# Altium PCB PCB3_3D.PcbDoc
Units mil, origin at the board's own origin, x right, y up, seen from the top; angles counter-clockwise.
Board outline 2978 x 3898 mil, 2 copper layers (Top Layer, Bottom Layer); 24 components, 87 nets, 148 pads, 0 vias.
Unrouted connection lines stored in the file: 67.
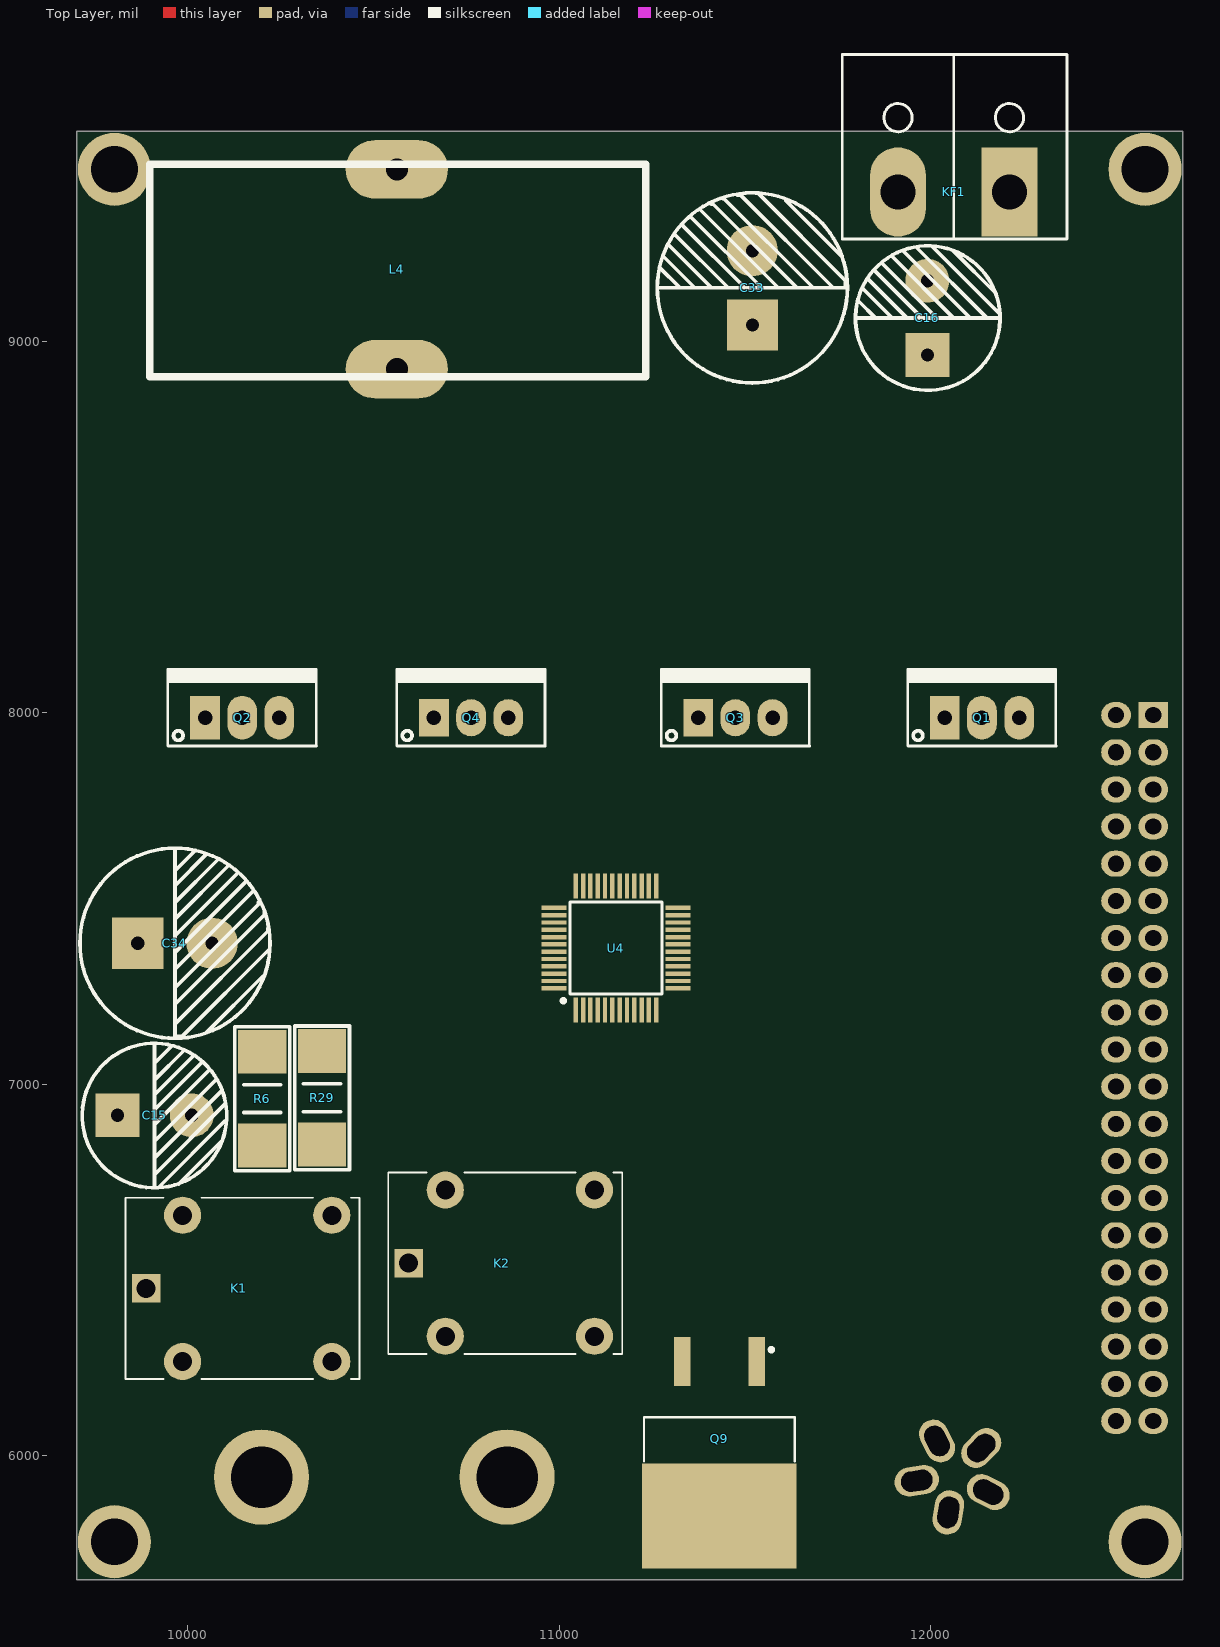
[diagram p0: Top Layer view]
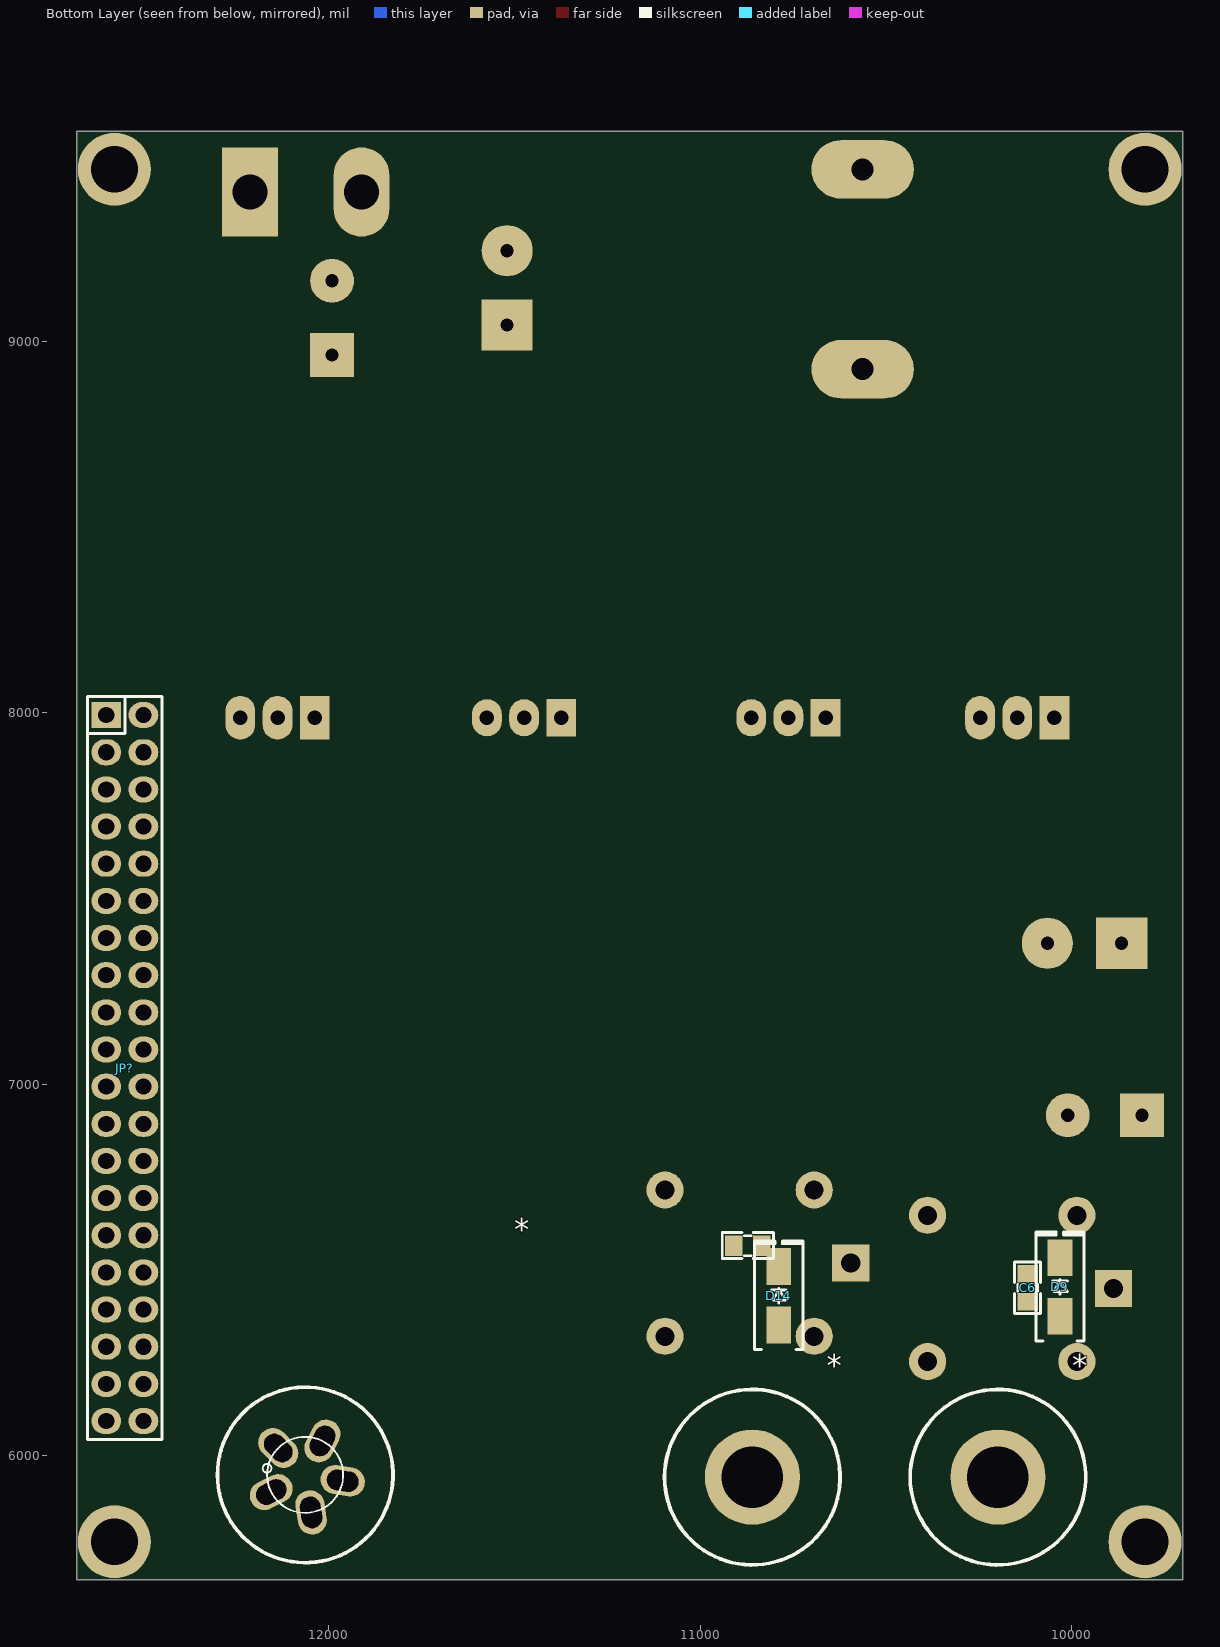
[diagram p1: Bottom Layer view, seen from below]

## Layer stack, top to bottom
Top Solder: solder mask 0.4, Solder Resist, Dk 3.5
Top Layer: signal copper 1.4
Dielectric 1: dielectric 12.6, FR-4, Dk 4.8
Bottom Layer: signal copper 1.4
Bottom Solder: solder mask 0.4, Solder Resist, Dk 3.5

## Board outline
9701,5667 9701,9565 12679,9565 12679,5667

## Design rules (kind name [scope] priority, off if disabled: settings)
Clearance [All] p1: gap=20 ignorepadtopadclearanceinfootprint=FALSE
DiffPairsRouting [All] p1: maxlimit=10 minlimit=8 mostfreqgap=10 toplayer_minwidth=8 toplayer_maxwidth=13 toplayer_prefwidth=10 bottomlayer_minwidth=8 bottomlayer_maxwidth=13 bottomlayer_prefwidth=10 maxuncoupledlength=500
PolygonConnect [All] p1: connectstyle=Direct reliefconductorwidth=10 reliefentries=4 polygonreliefangle="90 Angle" airgapwidth=10
RoutingVias [All] p1: holewidth=11.81 width=23.62 viastyle="Through Hole" minholewidth=11.81 minwidth=23.62 maxholewidth=11.81 maxwidth=23.62
SolderMaskExpansion [All] p1: expansion=4 istentingtop=FALSE
Width [All] p1: maxlimit=80 minlimit=8 preferedwidth=20
29 further rules are at their usual default settings.

## Classes and differential pairs
component class Main: C6 C15 C16 C33 C34 D9 D14 JP? K1 K2 KF1 L4 Q1 Q2 Q3 Q4 Q9 R6 R29 U4
differential pair S: +S_P -S_N
differential pair SO: +SO_P -SO_N

## Components (designator, comment, footprint, x,y, rotation, side; value= is the part's Value field where it differs from the comment)
* "Component_1" GX_12Jack? 12063.48,5949 r45 bottom
* "Jack2" jack_coc_loa 10199.06,5943 r180 bottom
* "Jack1" jack_coc_loa 10860.06,5943 r180 bottom
C6 "10pF" "tu 0805" 10119,6453 r270 bottom
C15 "1000uF" "tu hoa 10mm" 9911,6917 r0 top
C16 "1000uF" "tu hoa 10mm" 11991.27,9063 r90 top
C33 "1000uF" "tu hoa 13mm" 11520,9144 r90 top
C34 "1000uF" "tu hoa 13mm" 9966,7380 r0 top
D9 "SS34" "DIODE SMA" 10032,6455 r90 bottom
D14 "SS34" "DIODE SMA" 10789,6431.26 r90 bottom
JP? "JP 2x20 2.54" "JP 2x20 DT" 12549,7044 r270 bottom
K1 "SRA-05VDC-CL" RELAY_SRA-05VDC-CL 10148,6451 r0 top
K2 "SRA-05VDC-CL" RELAY_SRA-05VDC-CL 10855,6519 r0 top
KF1 "CON 2 KF7.62" "CON 2 KF7.62" 12210,9402 r180 top
L4 "97uH" IND_ATCA-08-750M-V 10563,9250 r270 top
Q1 "IRFZ44" TO220#1 12038,7987 r0 top
Q2 "IRFZ44" TO220#1 10047,7987 r0 top
Q3 "IRFZ44" TO220#2 11374.33,7987 r0 top
Q4 "IRFZ44" TO220#2 10663,7987 r0 top
Q9 "IRF4905S" D2PACK 11410,6013 r270 top
R6 "0.01R" "tro smd 2512" 10201,6962 r270 top
R29 "0.01R" "tro smd 2512" 10362,6964 r270 top
U4 "STM32F103C8T6" LQFP-48_19.6_393_58X11_SMD 11153,7367 r90 top
? "10pF" "tu 0805" 10872,6566 r0 bottom

## Footprints (in the part's own frame and the unit in brackets; to place one, negate y for a bottom-side part, rotate by r counter-clockwise, add the part's x,y. Pads: shape width x height; smd on the part's side, far side on the other; paste and mask are expansions set on the pad)
"CON 2 KF7.62" [mil]
  rect 150x240 hole 95: 1(-2,0)
  oval 150x240 hole 95: 2(298,0)
  silkscreen extent -157,-370 448,126, body extent -152,-370 448,122, height 493
D2PACK [mil]
  rect 132.23x44.65 smd: 1(-241.08,121.35) 3(-241.08,-78.65)
  rect 282.7x416 smd: 2(175.12,21.35)
  silkscreen extent -278,-182 28,224, body extent -282,-171 293,216, height 166
"DIODE SMA" [mm] "SMA"
  rect 2.5x1.7 smd: 1(-2,0) 2(2,0)
  silkscreen extent -3.68,-1.65 3.75,1.65, body extent -2.6,-1.37 2.6,1.37, height 2.4
GX_12Jack? [mm]
  oval 3.048x2 hole 1.4 slot 2.159 at 0 deg: 1(2.606,0)
  oval 3.048x2 hole 1.4 slot 2.159 at 108 deg rot 108: 2(0.809,-2.473)
  oval 3.048x2 hole 1.4 slot 2.159 at 36 deg rot 36: 3(-2.098,-1.528)
  oval 3.048x2 hole 1.4 slot 2.159 at 144 deg rot 144: 4(-2.098,1.528)
  oval 3.048x2 hole 1.4 slot 2.159 at 72 deg rot 72: 5(0.809,2.473)
  silkscreen extent -6,-6 6,6, body extent -10.89,-11.1 10.89,11.1, height 16.11
IND_ATCA-08-750M-V [mm]
  oval 4x7 hole 1.5: 1(-5.4,0) 2(8.255,0)
  silkscreen extent -5.75,-16.89 8.76,17.02
jack_coc_loa [mm]
  round 6.5 hole 4.2: 1(0,0)
  silkscreen extent -6,-6 6,6, body extent -6.45,-6.4 6.35,6.4, height 28.2
"JP 2x20 DT" [mil] "40 pins, dual pin, straight, gold plating"
  rect 70x80 hole 43.31: 1(-950,-50)
  oval 70x80 hole 43.31: 2(-850,-50) 3(-750,-50) 4(-650,-50) 5(-550,-50) 6(-450,-50) 7(-350,-50) 8(-250,-50) 9(-150,-50) 10(-50,-50) 11(50,-50) 12(150,-50) 13(250,-50) 14(350,-50) 15(450,-50) 16(550,-50) 17(650,-50) 18(750,-50) 19(850,-50) 20(950,-50) 21(950,50) 22(850,50) 23(750,50) 24(650,50) 25(550,50) 26(450,50) 27(350,50) 28(250,50) 29(150,50) 30(50,50) 31(-50,50) 32(-150,50) 33(-250,50) 34(-350,50) 35(-450,50) 36(-550,50) 37(-650,50) 38(-750,50) 39(-850,50) 40(-950,50)
  silkscreen extent -1000,-100 1000,100, body extent -1000,-100 1000,100, height 337
LQFP-48_19.6_393_58X11_SMD [mm] "48LQFP"
  rect 1.7x0.3 smd mask+0.076: 1(-4.238,2.75) 2(-4.238,2.25) 3(-4.238,1.75) 4(-4.238,1.25) 5(-4.238,0.75) 6(-4.238,0.25) 7(-4.238,-0.25) 8(-4.238,-0.75) 9(-4.238,-1.25) 10(-4.238,-1.75) 11(-4.238,-2.25) 12(-4.238,-2.75) 25(4.238,-2.75) 26(4.238,-2.25) 27(4.238,-1.75) 28(4.238,-1.25) 29(4.238,-0.75) 30(4.238,-0.25) 31(4.238,0.25) 32(4.238,0.75) 33(4.238,1.25) 34(4.238,1.75) 35(4.238,2.25) 36(4.238,2.75)
  rect 0.3x1.7 smd mask+0.076: 13(-2.75,-4.238) 14(-2.25,-4.238) 15(-1.75,-4.238) 16(-1.25,-4.238) 17(-0.75,-4.238) 18(-0.25,-4.238) 19(0.25,-4.238) 20(0.75,-4.238) 21(1.25,-4.238) 22(1.75,-4.238) 23(2.25,-4.238) 24(2.75,-4.238) 37(2.75,4.238) 38(2.25,4.238) 39(1.75,4.238) 40(1.25,4.238) 41(0.75,4.238) 42(0.25,4.238) 43(-0.25,4.238) 44(-0.75,4.238) 45(-1.25,4.238) 46(-1.75,4.238) 47(-2.25,4.238) 48(-2.75,4.238)
  silkscreen extent -3.72,-3.15 3.15,3.72, body extent -4.5,-4.5 4.5,4.5, height 1.7
RELAY_SRA-05VDC-CL [mm]
  round 2.54 hole 1.3: COIL1(-4.1,5) COIL2(-4.1,-5) NC(6.1,5) NO(6.1,-5)
  rect 1.95x1.95 / inner round 1.95 / far side rect 2.54x2.54 hole 1.3: COM(-6.6,0)
  silkscreen extent -8,-6.2 8,6.2, body extent -8,-6.2 8,6.2, height 17.2
TO220#1 [mil] "TO-220"
  rect 80x118.11 hole 39: 1(0,0)
  oval 80x118.11 hole 39: 2(100,0) 3(200,0)
  silkscreen extent -100,-76 300,130, body extent -95,-80 295,97, height 323
TO220#2 [mil] "TO-220"
  rect 80x100 hole 39: 1(0,0)
  oval 80x100 hole 39: 2(100,0) 3(200,0)
  silkscreen extent -100,-76 300,130, body extent -95,-80 295,97, height 323
"tro smd 2512" [mm]
  rect 3x3.3 smd: 1(-3.2,0) 2(3.2,0)
  silkscreen extent -4.9,-1.88 4.93,1.88, body extent -3.12,-1.57 3.18,1.58, height 0.82
"tu 0805" [mm] "Compoment SMD 80x50mil"
  rect 1.2x1.4 smd: 1(-0.946,-0.003) 2(0.954,-0.003)
  silkscreen extent -1.75,-0.89 1.75,0.89, body extent -1.01,-0.64 1.01,0.63, height 0.61
"tu hoa 10mm" [mm]
  rect 3x3 hole 0.9: 1(-2.54,0)
  round 3 hole 0.9: 2(2.54,0)
  silkscreen extent -4.95,-4.96 4.93,4.92, body extent -5,-5 5.01,5, height 20.01
"tu hoa 13mm" [mm]
  rect 3.5x3.5 hole 0.9: 1(-2.54,0)
  round 3.5 hole 0.9: 2(2.54,0)
  silkscreen extent -6.5,-6.5 6.5,6.5, body extent -6.25,-6.25 6.26,6.25, height 23.02

## Part data
* *: library part Jack?
C6 ?: library part "Tu 0805 101 50V 20%", "Dán", Chung_Loai=Dán, Don_Vi=Con, Ma_Hang=MH002806, So_Chan=2, Ten_Linh_Kien="Tụ 0805 101-0.1nF 50V 20%"
C15 C16: library part "Tu Hoa 1000uF 10V 10x12", "Cắm", Chung_Loai=Cắm, Don_Vi=Con, Ma_Hang=MH006614, So_Chan=2, Ten_Linh_Kien="Tụ Hóa 1000uF 10V 10x12MM"
C33 C34: library part "Tu Hoa 1000uF 50V 13x26", "Cắm", Chung_Loai=Cắm, Don_Vi=Con, Ma_Hang=MH006619, So_Chan=2, Ten_Linh_Kien="Tụ Hóa 1000uF 50V"
D9 D14: library part "Diode SS34 ( 1N5822 )", "Dán", Chung_Loai=Dán, Don_Vi=Con, Ma_Hang=MH002104, Ten_Linh_Kien="Diode SS34 3A 40V SMA ( 1N5822 SS34A)"
JP?: library part "JP 2x20 2.54 Duc Thang", "Cắm", Chung_Loai=Cắm, Don_Vi=Con, Ma_Hang=MH002686, Ten_Linh_Kien="Jump Đôi Đực 2.54MM 2x40P Thẳng 11MM"
K1 K2: Package=Package, Check_prices=https://www.snapeda.com/parts/SRA-05VDC-CL/Songle+Relay/view-part/?ref=eda, MF="Songle Relay", MP=SRA-05VDC-CL, SnapEDA_Link=https://www.snapeda.com/parts/SRA-05VDC-CL/Songle+Relay/view-part/?ref=snap
KF1: "Cắm", Chung_Loai=Cắm, Don_Vi=Con, Ma_Hang=MH002053, Ten_Linh_Kien="CON 2 KF7.62-2P 7.62MM (Đen Thẳng)"
L4: library part ATCA-08-750M-V, Package=None, Availability=Unavailable, MP=ATCA-08-750M-V, Price=None
Q1 Q2 Q3 Q4: library part "FET IRFZ44 DIP", "TO-220"
Q9: "55V 75A"
R6 R29: library part "Tro 2512 1% 0.01R", "Dán", Chung_Loai=Dán, Don_Vi=Con, Ma_Hang=MH004912, So_Chan=2, Ten_Linh_Kien="Trở 2512 1% R010-0.01R 1W"
U4: library part IC_STM32F103C8T6, "ARM® Cortex®-M3 STM32F1 Microcontroller IC 32-Bit 72MHz 64KB (64K x 8) FLASH 48-LQFP (7x7)", Alternate Part Number-1=NA, Case/Package=LQFP48, Manufacturer=STMicroelectronics, Manufacturer Part Number=STM32F103C8T6, Supplier Part Number-1=STM32F103C8T6, Supplier-1=LCSC

## Free pads (board coordinates)
  round 196.85 hole 125.98: 12(9803,5769) 12(9803,9463) 12(12577,5769) 12(12577,9463)

## Nets (pads, with @x,y where several pads share a name; then routed paths per layer and width w, separated by ;. In a path a pad name is that pad's centre, name@x,y a point inside that pad or via, vN(x,y) a via of type N, cw(c..) or ccw(c..) an arc to the next point about the centre after c; other vN are vias at no path point)
3v3: U4.24 U4.36 U4.48
+5: JP?.24 JP?.38
+12: ?.1 C6.1 D9.2 D14.2 JP?.23 JP?.39 K1.COIL1 K2.COIL1
AGND: U4.8
AVCC: U4.9
Blue: *.2 K2.NO
BT1: JP?.28 U4.46
BT2: JP?.13 U4.45
BT3: JP?.29 U4.43
BT4: JP?.12 U4.42
BT5: JP?.30 U4.41
buzzer: JP?.27 U4.3
CLK: U4.37
CS: JP?.34 U4.21
current_sense: U4.12
DC: JP?.8 U4.18
enc_a: JP?.10 U4.38
enc_b: JP?.31 U4.39
enc_c: JP?.11 U4.40
GND: JP?.2 JP?.3 JP?.4 JP?.16 JP?.17 U4.23 U4.35 U4.47
Green: *.3
heater: 
HS1: Q1.1
HS2: Q2.1
IO: U4.34
led: JP?.14 U4.2
LS1: Q3.1
LS2: Q4.1
MISO: JP?.9 U4.16
MOSI: JP?.33 U4.17
Net_2: ?.2 D14.1 K2.COIL2
NetC2_2: 
NetC6_2: C6.2 D9.1 K1.COIL2
NetC22_2: 
NetC43_2: 
NetC65_1: U4.5
NetC66_1: U4.6
NetD2_2: 
NetD3_2: 
NetD5_2: 
NetD6_2: 
NetD10_1: Q9.1
NetD13_2: 
NetIC1_1: 
NetIC1_2: 
NetIC1_3: 
NetIC1_6: 
NetIC1_7: 
NetQ7_1: 
NetQ8_1: 
NetQ10_1: 
NetQ10_3: 
NetQ12_1: 
NetR22_1: U4.44
NetR28_2: U4.20
NetRF2_1: 
PGND: C15.2 C16.2 C33.2 C34.2 JP?.40 KF1.2 Q3.3 Q4.3 R6.1 R29.1
POWER: C16.1 C33.1 JP?.1 KF1.1 Q1.2
Power+: *.1@10199.06,5943 K1.NC
Power-: *.1@10860.06,5943 K2.NC
PowerSolider+: K1.NO Q9.3
Red: *.1@12136.02,6021.54 Q9.2
RESET: JP?.7 U4.19
RST: U4.7
S_N: 
S_P: 
S_sense: 
SCK: JP?.32 U4.15
SD: U4.31
SO_N: 
SO_P: 
stand_inp: U4.22
switch: U4.4
T_CS: JP?.5 U4.25
T_IRQ: JP?.36 U4.26
temp_fet: U4.10
temp_solid: U4.13
TIM1_CH1: U4.29
TIM1_CH2: U4.30
USB_N: JP?.35 U4.32
USB_P: JP?.6 U4.33
vin_sense: U4.14
Vout_N: K2.COM R6.2 R29.2
Vout_P: C15.1 C34.1 K1.COM Q2.2
vout_sense: U4.11
VS1: L4.1 Q1.3 Q3.2
VS2: L4.2 Q2.3 Q4.2
pads on no net: *.4 *.5 JP?.15 JP?.18 JP?.19 JP?.20 JP?.21 JP?.22 JP?.25 JP?.26 JP?.37 U4.1 U4.27 U4.28

## Other copper
Bottom Layer:
  region: 11333.81,6009.19
  region: 11333.81,6009.19
  region: 11333.81,6009.19
  region: 11333.81,6009.19
  region: 11333.81,6009.19
  region: 11333.81,6009.19
  region: 11333.81,6009.19
  region: 11333.81,6009.19
  region: 11333.81,6009.19
  region: 11333.81,6009.19
  region: 11333.81,6009.19
  region: 11333.81,6009.19
  region: 11333.81,6009.19
  region: 11619.81,9589.19
  region: 11619.81,9589.19
  region: 11619.81,9589.19
  region: 11619.81,9589.19
  region: 11619.81,9589.19
  region: 11619.81,9589.19
  region: 11619.81,9589.19
  region: 11619.81,9589.19
  region: 11619.81,9589.19
  region: 11619.81,9589.19
  region: 11619.81,9589.19
  region: 11619.81,9589.19
  region: 11619.81,9589.19
  region: 11388.81,9589.19
  region: 11388.81,9589.19
  region: 11388.81,9589.19
  region: 11388.81,9589.19
  region: 11388.81,9589.19
  region: 11388.81,9589.19
  region: 11388.81,9589.19
  region: 11388.81,9589.19
  region: 11388.81,9589.19
  region: 11388.81,9589.19
  region: 11388.81,9589.19
  region: 11388.81,9589.19
  region: 11388.81,9589.19
  region: 12295.72,9291.46
  region: 12295.72,9291.46
  region: 12295.72,9291.46
  region: 12295.72,9291.46
  region: 12295.72,9291.46
  region: 12295.72,9291.46
  region: 12295.72,9291.46
  region: 12295.72,9291.46
  region: 12295.72,9291.46
  region: 12295.72,9291.46
  region: 12295.72,9291.46
  region: 12295.72,9291.46
  region: 12295.72,9291.46
  region: 11989.72,8880.46
  region: 11989.72,8880.46
  region: 11989.72,8880.46
  region: 11989.72,8880.46
  region: 11989.72,8880.46
  region: 11989.72,8880.46
  region: 11989.72,8880.46
  region: 11989.72,8880.46
  region: 11989.72,8880.46
  region: 11989.72,8880.46
  region: 11989.72,8880.46
  region: 11989.72,8880.46
  region: 11989.72,8880.46
  region: 10391.81,8565.19
  region: 10391.81,8565.19
  region: 10391.81,8565.19
  region: 10391.81,8565.19
  region: 10391.81,8565.19
  region: 10391.81,8565.19
  region: 10391.81,8565.19
  region: 10391.81,8565.19
  region: 10391.81,8565.19
  region: 10391.81,8565.19
  region: 10391.81,8565.19
  region: 10391.81,8565.19
  region: 10391.81,8565.19
  region: 10391.81,8838.19
  region: 10391.81,8838.19
  region: 10391.81,8838.19
  region: 10391.81,8838.19
  region: 10391.81,8838.19
  region: 10391.81,8838.19
  region: 10391.81,8838.19
  region: 10391.81,8838.19
  region: 10391.81,8838.19
  region: 10391.81,8838.19
  region: 10391.81,8838.19
  region: 10391.81,8838.19
  region: 10391.81,8838.19
  region: 9810.81,6776.19
  region: 9810.81,6776.19
  region: 9810.81,6776.19
  region: 9810.81,6776.19
  region: 9810.81,6776.19
  region: 9810.81,6776.19
  region: 9810.81,6776.19
  region: 9810.81,6776.19
  region: 9810.81,6776.19
  region: 9810.81,6776.19
  region: 9810.81,6776.19
  region: 9810.81,6776.19
  region: 9810.81,6776.19
  region: 9810.81,6503.19
  region: 9810.81,6503.19
  region: 9810.81,6503.19
  region: 9810.81,6503.19
  region: 9810.81,6503.19
  region: 9810.81,6503.19
  region: 9810.81,6503.19
  region: 9810.81,6503.19
  region: 9810.81,6503.19
  region: 9810.81,6503.19
  region: 9810.81,6503.19
  region: 9810.81,6503.19
  region: 9810.81,6503.19
  region: 9810.81,7175.19
  region: 9810.81,7175.19
  region: 9810.81,7175.19
  region: 9810.81,7175.19
  region: 9810.81,7175.19
  region: 9810.81,7175.19
  region: 9810.81,7175.19
  region: 9810.81,7175.19
  region: 9810.81,7175.19
  region: 9810.81,7175.19
  region: 9810.81,7175.19
  region: 9810.81,7175.19
  region: 9810.81,7175.19
  region: 9810.81,6902.19
  region: 9810.81,6902.19
  region: 9810.81,6902.19
  region: 9810.81,6902.19
  region: 9810.81,6902.19
  region: 9810.81,6902.19
  region: 9810.81,6902.19
  region: 9810.81,6902.19
  region: 9810.81,6902.19
  region: 9810.81,6902.19
  region: 9810.81,6902.19
  region: 9810.81,6902.19
  region: 9810.81,6902.19
  region: 9836.81,7824.19
  region: 9836.81,7824.19
  region: 9836.81,7824.19
  region: 9836.81,7824.19
  region: 9836.81,7824.19
  region: 9836.81,7824.19
  region: 9836.81,7824.19
  region: 9836.81,7824.19
  region: 9836.81,7824.19
  region: 9836.81,7824.19
  region: 9836.81,7824.19
  region: 9836.81,7824.19
  region: 9836.81,7824.19
  region: 9836.81,8097.19
  region: 9836.81,8097.19
  region: 9836.81,8097.19
  region: 9836.81,8097.19
  region: 9836.81,8097.19
  region: 9836.81,8097.19
  region: 9836.81,8097.19
  region: 9836.81,8097.19
  region: 9836.81,8097.19
  region: 9836.81,8097.19
  region: 9836.81,8097.19
  region: 9836.81,8097.19
  region: 9836.81,8097.19
  region: 9965.81,8627.19
  region: 9965.81,8627.19
  region: 9965.81,8627.19
  region: 9965.81,8627.19
  region: 9965.81,8627.19
  region: 9965.81,8627.19
  region: 9965.81,8627.19
  region: 9965.81,8627.19
  region: 9965.81,8627.19
  region: 9965.81,8627.19
  region: 9965.81,8627.19
  region: 9965.81,8627.19
  region: 9965.81,8627.19
  region: 9851.81,9068.19
  region: 9851.81,9068.19
  region: 9851.81,9068.19
  region: 9851.81,9068.19
  region: 9851.81,9068.19
  region: 9851.81,9068.19
  region: 9851.81,9068.19
  region: 9851.81,9068.19
  region: 9851.81,9068.19
  region: 9851.81,9068.19
  region: 9851.81,9068.19
  region: 9851.81,9068.19
  region: 9851.81,9068.19
  region: 10781.81,9569.19
  region: 10781.81,9569.19
  region: 10781.81,9569.19
  region: 10781.81,9569.19
  region: 10781.81,9569.19
  region: 10781.81,9569.19
  region: 10781.81,9569.19
  region: 10781.81,9569.19
  region: 10781.81,9569.19
  region: 10781.81,9569.19
  region: 10781.81,9569.19
  region: 10781.81,9569.19
  region: 10781.81,9569.19
  region: 10174.81,9569.19
  region: 10174.81,9569.19
  region: 10174.81,9569.19
  region: 10174.81,9569.19
  region: 10174.81,9569.19
  region: 10174.81,9569.19
  region: 10174.81,9569.19
  region: 10174.81,9569.19
  region: 10174.81,9569.19
  region: 10174.81,9569.19
  region: 10174.81,9569.19
  region: 10174.81,9569.19
  region: 10174.81,9569.19